# Altium PCB Voltage & Current Sensor V2.PcbDoc
Units mil, origin at the board's own origin, x right, y up, seen from the top; angles counter-clockwise.
Board outline 2295.15 x 865 mil, 4 copper layers (Signal 1 Layer, GND Layer, V+ Layer, Signal 2 Layer), stack 62.449 mil thick; 18 components, 10 nets, 51 pads, 14 vias.
Unrouted connection lines stored in the file: 1.
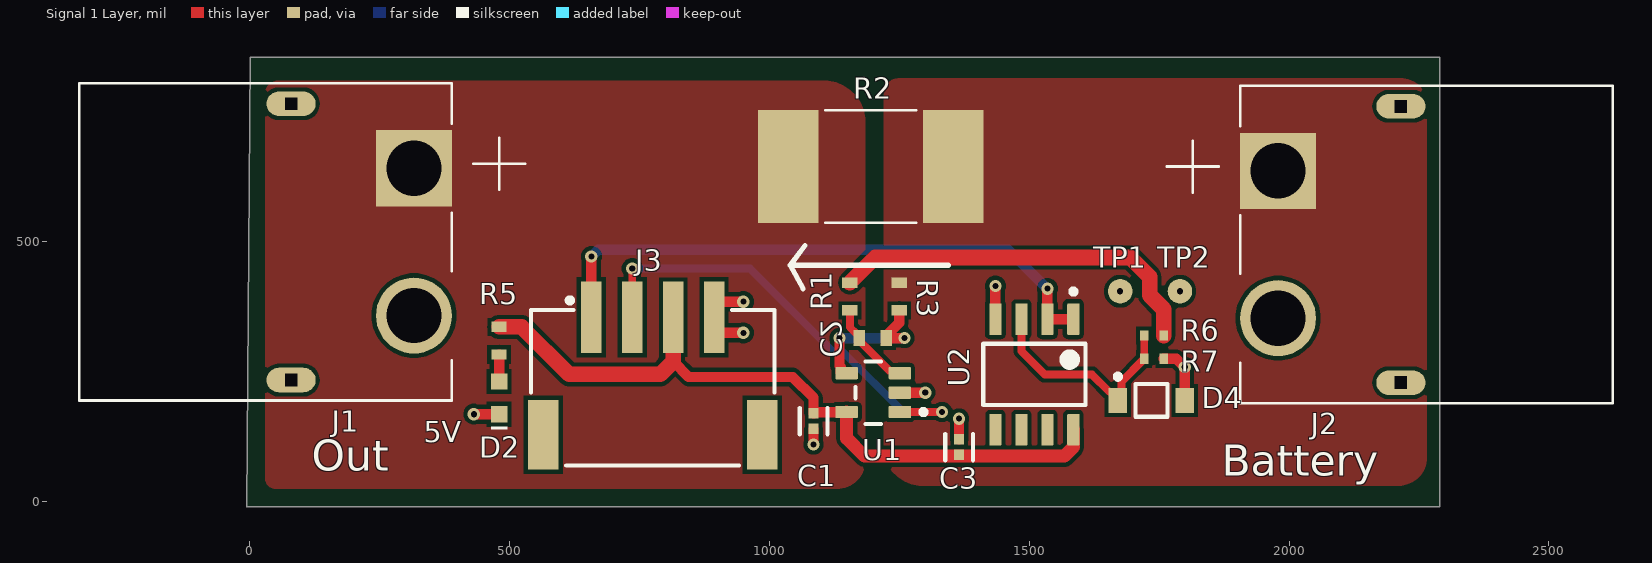
[diagram p0: Signal 1 Layer view]
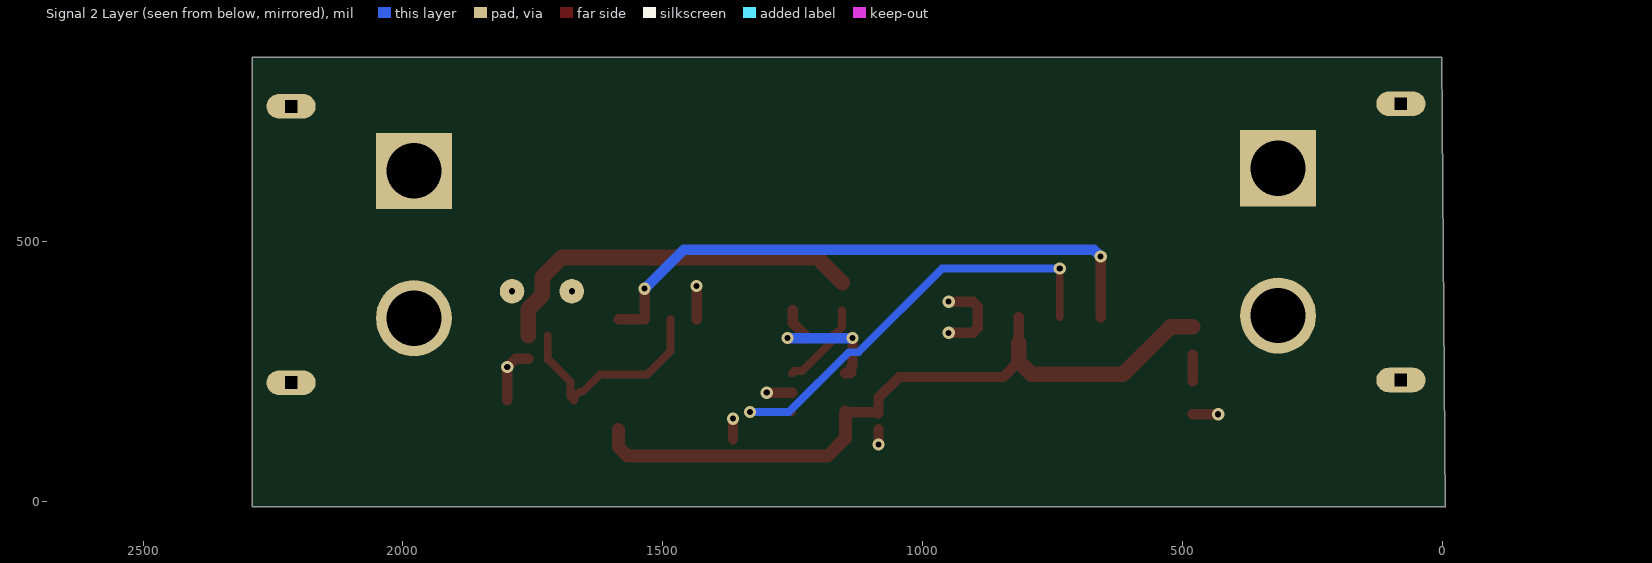
[diagram p1: Signal 2 Layer view, seen from below]
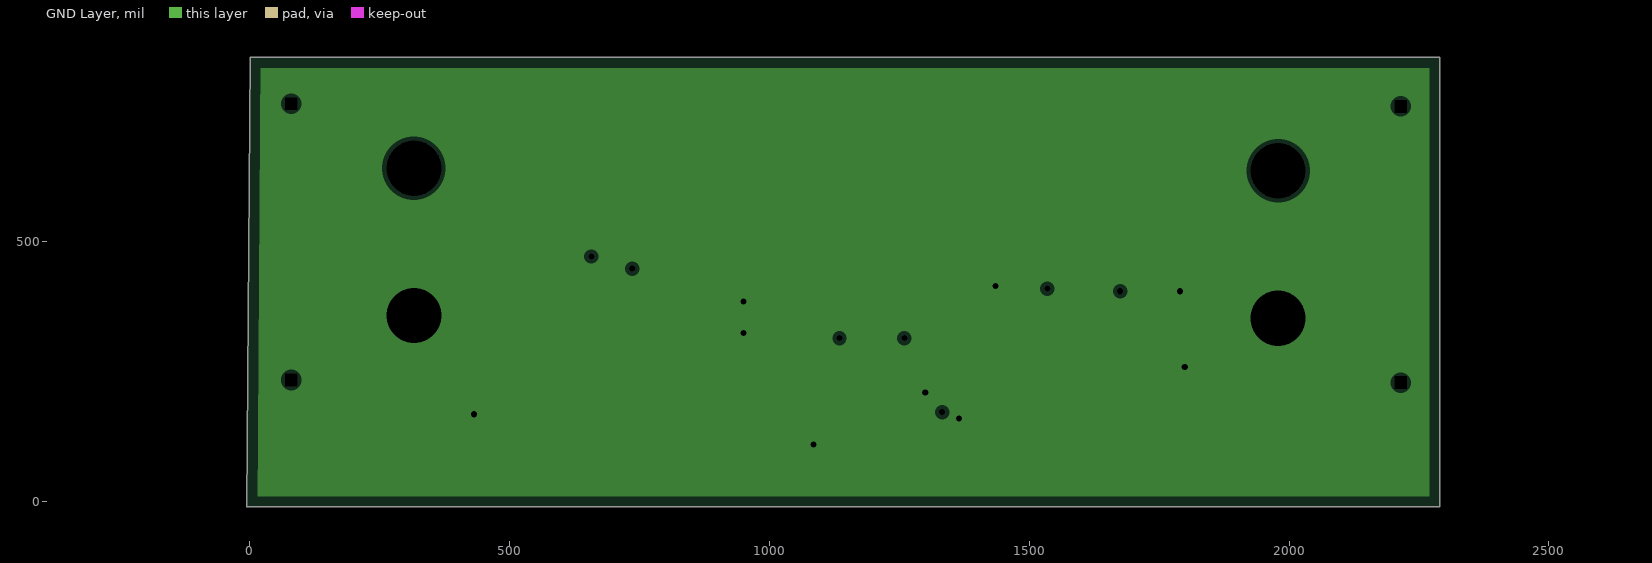
[diagram p2: GND Layer, clearances drawn from the general rule]
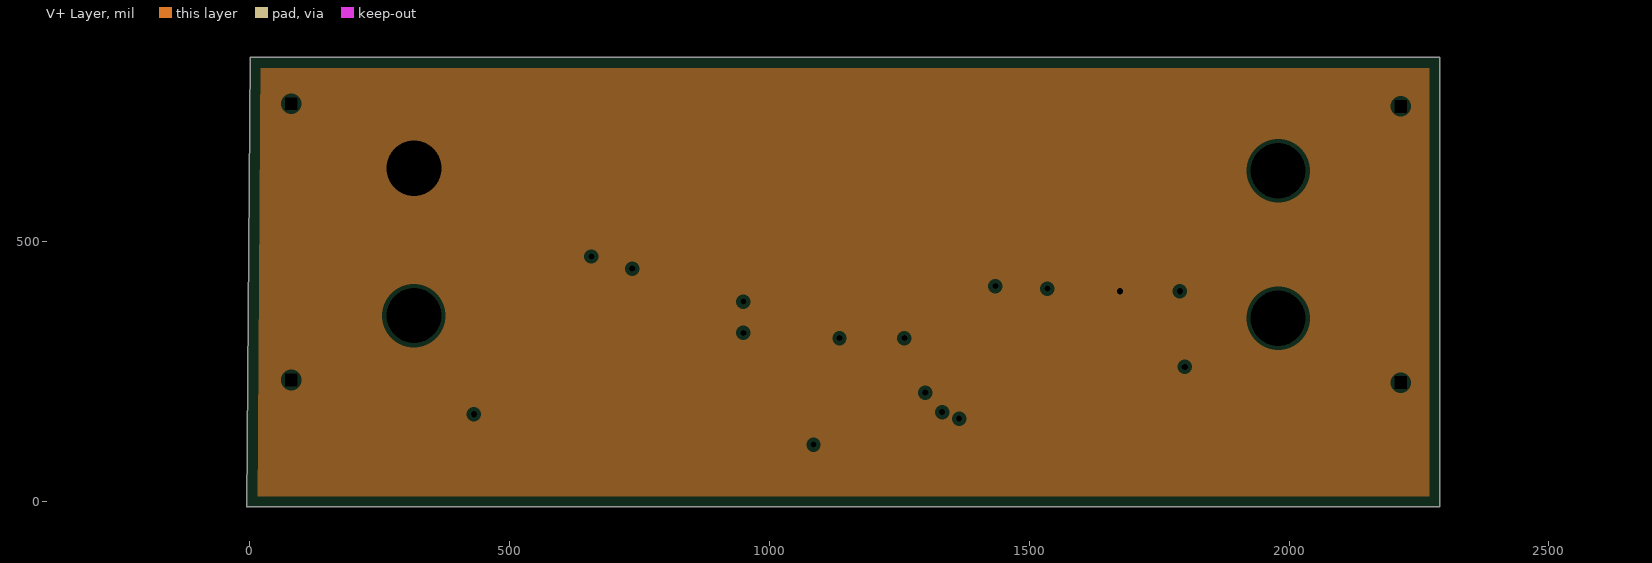
[diagram p3: V+ Layer, clearances drawn from the general rule]
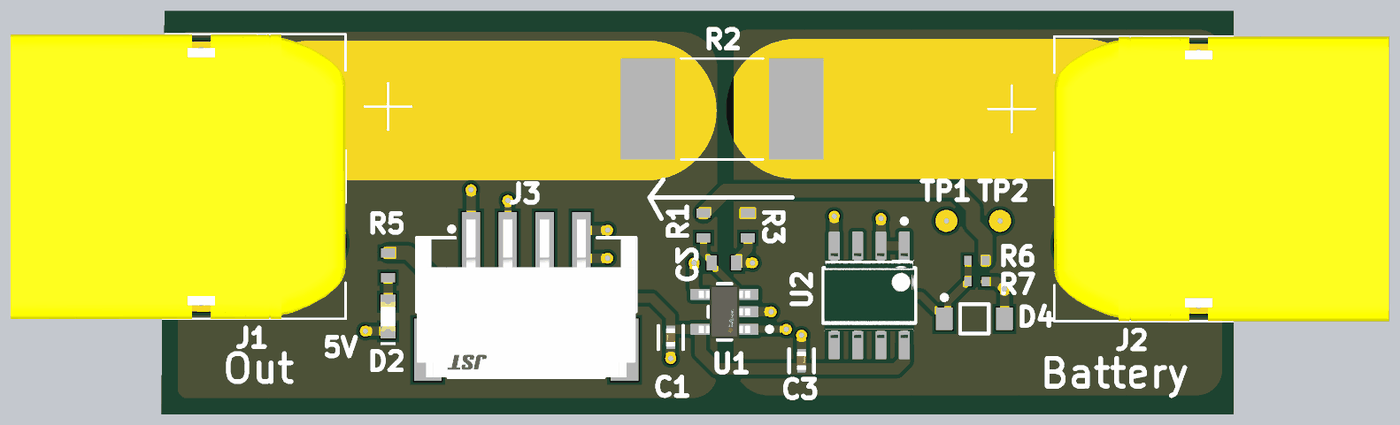
[diagram p4: 3D render of the assembled board from above, using the file's embedded part models]

## Layer stack, top to bottom
Top Solder: solder mask 0.4, Solder Resist, Dk 3.5
Signal 1 Layer: signal copper 1.378
Dielectric 2: prepreg 8.2835, PP-006, Dk 4.1
GND Layer: plane copper 0.5984, net GND
Dielectric 1: dielectric 41.9291, FR-4, Dk 4.8
V+ Layer: plane copper 0.5984, net V+
Dielectric 3: prepreg 8.2835, PP-006, Dk 4.1
Signal 2 Layer: signal copper 1.378
Bottom Solder: solder mask 0.4, Solder Resist, Dk 3.5

## Board outline
1.4,855 -5.15,-9.85 ccw(c-5,-9.85) -5,-9.71 2290,-9.71 2290,855

## Design rules (kind name [scope] priority, off if disabled: settings)
BoardOutlineClearance [All] p1: gap=7.87 ignorepadtopadclearanceinfootprint=FALSE
Clearance [All] p1: gap=8 ignorepadtopadclearanceinfootprint=FALSE except(9.84: Arc-Hole Track-Hole SMDPad-Hole THPad-Hole Via-Hole Fill-Hole Poly-Hole Region-Hole Text-Hole)
ComponentClearance [All] p1: gap=5 collisioncheckmode=3 verticalgap=5 showdistances=TRUE
DiffPairsRouting [All] p1: maxlimit=15 minlimit=8 mostfreqgap=8 toplayer_minwidth=8 toplayer_maxwidth=1000 toplayer_prefwidth=8 bottomlayer_minwidth=8 bottomlayer_maxwidth=1000 bottomlayer_prefwidth=8 maxuncoupledlength=500
Height [All] p1: minheight=0 maxheight=71497.94 prefheight=500
HoleSize [All] p1: absolutevalues=TRUE maxlimit=248.03 minlimit=11.81 maxpercent=80.000 minpercent=20.000
HoleToHoleClearance [All] p1: gap=9.84 allowstackedmicrovias=FALSE
MinimumAnnularRing [All] p1: minimumring=3
MinimumSolderMaskSliver [All] p1: minsoldermaskwidth=0
PlaneClearance [All] p1: clearance=8
PlaneConnect PlaneConnectPowerPads [InPadClass('PowerPads')] p1: planeconnectstyle=Direct reliefexpansion=20 reliefentries=4 reliefconductorwidth=10 reliefairgap=10
PlaneConnect [All] p2: pad.planeconnectstyle=Relief pad.reliefexpansion=11.81 pad.reliefentries=4 pad.reliefconductorwidth=8 pad.reliefairgap=8 via.planeconnectstyle=Direct via.reliefexpansion=11.81 via.reliefentries=4 via.reliefconductorwidth=5 via.reliefairgap=5
PolygonConnect PolygonConnectPowerPads [All vs (InPadClass('PowerPads'))] p1: connectstyle=Direct reliefconductorwidth=10 reliefentries=4 polygonreliefangle="90 Angle" airgapwidth=10
PolygonConnect [All] p2: connectstyle=Direct reliefconductorwidth=8 reliefentries=4 polygonreliefangle="90 Angle" airgapwidth=8
RoutingVias [All] p1: holewidth=11.81 width=23.62 viastyle="Through Hole" minholewidth=11.81 minwidth=23.62 maxholewidth=23.62 maxwidth=259.84
SilkToSilkClearance [All] p1: silktosilkclearance=0
SilkToSolderMaskClearance [IsPad] p1: minsilkscreentomaskgap=5 clearancetoexposedcopper=TRUE
SolderMaskExpansion [All] p1: expansion=2.95 istentingtop=FALSE
Width [All] p1: maxlimit=1000 minlimit=8 preferedwidth=8 minimp=50.000000 maximp=50.000000 favimp=50.000000
20 further rules are at their usual default settings.

## Components (designator, comment, footprint, x,y, rotation, side; value= is the part's Value field where it differs from the comment)
C1 "0.1 uF" FP-CL17-IPC_C 1085,155 r270 top
C2 "1uF" "IPC C C0603 NO SILK" 1199.02,315 r180 top value=?F
C3 "0.1 uF" FP-CL17-IPC_C 1365,105 r90 top
D2 "150060GS75000" WL-SMCW_0603_150060xx75000 480,200 r90 top
D4 "3.6V" ONSC-SOD-123-2-425-04_V 1735,195 r0 top
J1 "XT60PW-M" AMASS_XT60PW-M#1 80,500 r90 top
J2 "XT60PW-M" AMASS_XT60PW-M#2 2215,495 r90 top
J3 "S4B-PH-SM4-TB" FP-S4B-PH-SM4-TB-MFG 775.63,219.17 r180 top
R1 "10" "IPC C R0603 NO SILK" 1155,395 r270 top value=?
R2 "1m" RESC10052X105N 1195,645 r180 top
R3 "10" "IPC C R0603 NO SILK" 1250,395 r270 top value=?
R5 "62" "IPC C R0603 NO SILK" 480,310 r90 top value=?
R6 "2k" "IPC C R0402 NO SILK" 1740,320 r0 top value=?
R7 "470" "IPC C R0402 NO SILK" 1740,275 r180 top value=?
TP1 "TP1" TP1 1675,405 r0 top
TP2 "TP1" TP1 1790,405 r0 top
U1 "INA180A2IDBVR" FP-DBV0005A-MFG 1200,210 r180 top
U2 "LM358LVIDR" FP-D0008A-MFG 1510,245 r270 top

## Footprints (in the part's own frame and the unit in brackets; to place one, negate y for a bottom-side part, rotate by r counter-clockwise, add the part's x,y. Pads: shape width x height; smd on the part's side, far side on the other; paste and mask are expansions set on the pad)
AMASS_XT60PW-M#1 [mm]
  rect 3.716x3.716 / inner round 3.716 / far side rect 3.716x3.716 hole 2.7: 1(3.6,-6)
  round 3.716 hole 2.7: 2(-3.6,-6)
  oval 1.2x2.4 hole 0.6 square: S1(6.75,0) S2(-6.75,0)
  silkscreen extent -7.75,-11.43 7.75,10.35, body extent -7.75,-7.85 7.75,10.35, height 8.4
AMASS_XT60PW-M#2 [mm]
  rect 3.716x3.716 / inner round 3.716 / far side rect 3.716x3.716 hole 2.7: 1(3.6,6)
  round 3.716 hole 2.7: 2(-3.6,6)
  oval 1.2x2.4 hole 0.6 square: S1(6.75,0) S2(-6.75,0)
  silkscreen extent -7.75,-10.35 7.75,11.43, body extent -7.75,-10.35 7.75,7.85, height 8.4
FP-CL17-IPC_C [mil]
  rect 20.29x18.6 smd paste+0 mask+0: 1(-14.9,0) 2(14.9,0)
  silkscreen extent -25,-27 25,27, body extent -20,-10 20,10, height 22
FP-D0008A-MFG [mm]
  rrect17% 1.55x0.6 smd paste+0 mask+0: 1(-2.7,1.905) 2(-2.7,0.635) 3(-2.7,-0.635) 4(-2.7,-1.905) 5(2.7,-1.905) 6(2.7,-0.635) 7(2.7,0.635) 8(2.7,1.905)
  silkscreen extent -4.17,-2.5 1.5,2.5, body extent -3.57,-2.75 3.57,2.75, height 0.25
FP-DBV0005A-MFG [mm]
  rrect17% 1.1x0.6 smd paste+0 mask+0: 1(-1.3,0.95) 2(-1.3,0) 3(-1.3,-0.95) 4(1.3,-0.95) 5(1.3,0.95)
  silkscreen extent -2.58,-1.53 0.87,1.53, body extent -1.4,-1.45 1.4,1.45, height 1.45
FP-S4B-PH-SM4-TB-MFG [mm]
  rect 1x3.5 smd: 1(3,-3.45) 2(1,-3.45) 3(-1,-3.45) 4(-3,-3.45)
  rect 1.5x3.4 smd: 5(-5.35,2.3) 6(5.35,2.3)
  silkscreen extent -5.95,-4.4 5.95,3.8, body extent -6.2,-5.3 6.2,4.1, height 0.25
"IPC C C0603 NO SILK" [mm] "Chip Capacitor, 2-Leads, Body 1.52x0.76mm, IPC High Density"
  rect 0.56x0.8 smd: 1(-0.66,0) 2(0.66,0)
  body extent -0.76,-0.38 0.76,0.38, height 0.77
"IPC C R0402 NO SILK" [mm] "Chip Resistor, 2-Leads, Body 1.02x0.51mm, IPC High Density"
  rect 0.4x0.5 smd: 1(-0.475,0) 2(0.475,0)
  body extent -0.51,-0.26 0.51,0.26, height 0.26
"IPC C R0603 NO SILK" [mm] "Chip Resistor, 2-Leads, Body 1.52x0.76mm, IPC High Density"
  rect 0.5x0.75 smd: 1(-0.675,0) 2(0.675,0)
  body extent -0.76,-0.38 0.76,0.38, height 0.39
ONSC-SOD-123-2-425-04_V [mm] "SOD, 2-Leads, Body 2.69x1.6mm"
  rect 0.91x1.22 smd: 1(-1.635,0) 2(1.635,0)
  silkscreen extent -1.76,-0.8 0.78,1.28, body extent -1.35,-0.8 1.35,0.8, height 1.35
RESC10052X105N [mm]
  rect 2.96x5.51 smd: 1(-4.027,0) 2(4.027,0)
  silkscreen extent -2.23,-2.75 2.23,2.75
TP1 [mm]
  round 1.2 hole 0.3: 1(0,0)
WL-SMCW_0603_150060xx75000 [mm] "SMD Mono-color Chip LED, body 1.60 x 0.80 mm"
  rect 0.8x0.8 smd: 1(-0.8,0) 2(0.8,0)
  silkscreen extent -1.55,-0.4 -1.4,0.4, body extent -0.8,-0.4 0.8,0.4, height 0.7

## Part data
C1 C3: library part CMP-13271-001069-1, "Cap Ceramic 100nF 10V X7R ±10% SMD 0402 +125°C Paper T/RCL05B104KP5NNNC", Capacitance=100nF, Case Code (Imperial)=0402, Case Code (Metric)=1005, Dielectric=X7R, Max Operating Temperature=125°C, Min Operating Temperature=-55°C, Package Quantity=1, Tolerance=10%, Voltage Rating=10V, Case/Package=0402, Contact Plating=Tin, Depth=0.5mm, Height=0.5mm, Length=1mm, Mount="Surface Mount", Packaging="Tape and Reel", Radiation Hardening=No, Thickness=0.022inch, Width=0.02inch
C2: library part CMP-002-000001-1, "Generic CAP 0603", Design Item ID="Generic CAP 0603", Source=Schlib1.SchLib
D2: library part CMP-1426-00002-4, "430mcd Colorless transparence 520nm Emerald 140° LED0603 Light Emitting Diodes (LED) ROHS", Case Code (Imperial)=0603, Case Code (Metric)=1608, Color=Green, Forward Current=100mA, Forward Voltage=3.2V, Max Junction Temperature (Tj)=95°C, Max Operating Temperature=85°C, Max Reverse Voltage (DC)=5V, Min Operating Temperature=-40°C, Output Current=10µA, Power Dissipation=105mW, Test Current=20mA, Case/Package=0603, Dominant Wavelength=525nm, Height=700µm, Lead Free="Lead Free", Length=1.6mm, Lens Style="Clear, Rectangular", Luminous Intensity=430mcd, Mount="Surface Mount", Packaging="Tape and Reel", Peak Wavelength=515nm, REACH SVHC=Unknown, Reverse Voltage=5V, RoHS=Compliant, Viewing Angle=140°, Wavelength=525nm, Width=800µm
D4: library part CMP-1060-00574-1, "Zener Voltage Regulator, 500 mW, 2-Pin SOD-123, Pb-Free, Tape and Reel. 3.6V breakdown voltage MMSZ4685T1G", Manufacturer="On Semiconductor", PartNumber=MMSZ4685T1G, ComponentLink1Description="Manufacturer URL", ComponentLink1URL=http://www.onsemi.com/, ComponentLink2Description=Datasheet, ComponentLink2URL=http://www.onsemi.com/pub_link/Collateral/MMSZ4678T1-D.PDF, ComponentLink3Description="Package Specification", ComponentLink3URL=http://www.onsemi.com/pub_link/Collateral/425-04.PDF, DatasheetVersion="Rev. 9", Mounting Technology="Surface Mount", P Max (W)=0.5, PackageDescription="2-Pin SOD, Body 1.6 x 2.69 mm", PackageReference=SOD-123-2-425-04, PackageVersion="Rev. G, 10/2009", Packing="Tape and Reel", RoHS=Pb-Free, VZ Typ (V)=3.6
J1 J2: library part CMP-003-000005-1, "Socket, DC supply, male, PIN: 2", Package=Package, Availability="Not in stock", Check_prices=https://www.snapeda.com/parts/XT60PW-M/AMASS/view-part/?ref=eda, Component Type=Standard, Design Item ID=XT60PW-M, MF=AMASS, MP=XT60PW-M, Pin Count=2, Price=None, SnapEDA_Link=https://www.snapeda.com/parts/XT60PW-M/AMASS/view-part/?ref=snap, Source=XT60PW-M.SchLib
J3: library part CMP-00504-08293667-1, "S4B-PH-SM4-TB Header S4B-PH-SM4-TB, 2.00mm, 4-contacts, side entry, SMT, /1000/reel", Contact Resistance=20mΩ, Current Rating=2A, Housing Color=Beige, Max Operating Temperature=85°C, Max Voltage Rating (AC)=100V, Min Operating Temperature=-25°C, Contact Material="Copper, Tin", Contact Plating="Copper, Tin", Depth=7.6mm, Gender=Male, Height=5.5mm, Housing Material=Polyamide, Length=11.9mm, Max Current Rating=2A, Max Voltage Rating (DC)=100V, Number of Contacts=4, Number of Pins=4, Number of Rows=1, Packaging="Tape and Reel", Pitch=2mm, RoHS=Non-Compliant, Termination=Solder, Voltage Rating=100V
R1 R3 R5: library part CMP-008-000001-2, "Generic RES 0603", Design Item ID="Generic RES 0603", Source=Schlib1.SchLib
R2: library part PSR400ITQFH1L00, "Res Metal Film 3921 1mOhm 1% 4W Â±75ppm/Â°C Molded SMD Emboss T/R PSR400ITQFH1L00", Package=None, Availability=Unavailable, MP=PSR400ITQFH1L00, Price=None
R6 R7: library part CMP-008-000000-1, "Generic RES 0402", Design Item ID="Generic RES 0402", Source=Schlib1.SchLib
TP1 TP2: library part CMP-00003-3, "Testpoint double sided"
U1: library part CMP-04895-000287-1, "IC CURR SENSE 1 CIRCUIT SOT23-5 50V/V", Case/Package=SOT-23-5, Input Bias Current=100nA, Input Offset Voltage (Vos)=100uV, Max Operating Temperature=125°C, Min Operating Temperature=-40°C, Operating Supply Current=260uA, -3db Bandwidth=350kHz, Mount="Surface Mount", Number of Circuits=1, Packaging="Tape and Reel", RoHS Compliant=Yes, Slew Rate=2V/µs
U2: library part CMP-04895-000442-1, "IC OPAMP GP 2 CIRCUIT 8SOIC", Case/Package=SOIC, Input Bias Current=15pA, Input Offset Voltage (Vos)=1mV, Max Operating Temperature=125°C, Min Operating Temperature=-40°C, Operating Supply Current=90uA, Output Current per Channel=40mA, Gain Bandwidth Product=1MHz, Mount="Surface Mount", Number of Circuits=2, Number of Pins=8, Packaging="Cut Tape", RoHS Compliant=Yes, Slew Rate=1.5V/µs

## Via types
v1: diameter 23.62, hole 11.81, Signal 1 Layer to Signal 2 Layer, 14 vias

## Nets (pads, with @x,y where several pads share a name; then routed paths per layer and width w, separated by ;. In a path a pad name is that pad's centre, name@x,y a point inside that pad or via, vN(x,y) a via of type N, cw(c..) or ccw(c..) an arc to the next point about the centre after c; other vN are vias at no path point)
5V: C1.1 C3.1 J3.3 R5.2 U1.5 U2.8 | length 1404.2
  Signal 1 Layer w20: 815,270 845,240 1045,240 1085,200 C1.1 1085.55,169.9 1088.25,172.6 U1.5 ; J3.3@815,305.79 J3.3
  Signal 1 Layer w25: U1.5 1148.82,121.91 1183.04,87.69 1567.69,87.69 1585,105 U2.8
  Signal 1 Layer w30: R5.2 523.43,336.57 615,245 790,245 815,270 J3.3@815,305.79
GND: C1.2 C3.2 D2.1 D4.2 J1.2 J2.2 J3.4 R7.1 TP2.1 U1.2 U2.4 | length 506.3
  Signal 1 Layer w20: v1@430,170 ccw(c431.5,170) v1(431.5,168.5) D2.1 ; v1(950,325) 903.43,325 893.74,334.69 893.74,375.31 903.43,385 v1(950,385) ; v1(1085,110) C1.2 ; U1.2 v1(1300,210) ; C3.2 v1(1365,160) ; U2.4 v1(1435,415) ; R7.1 1782.76,275 1798.39,259.37 v1(1799.37,259.37) D4.2
Iout: J3.2 U1.1 | length 885.5
  Signal 1 Layer w15: J3.2 v1(736.26,448.74) ; U1.1 v1(1332.4,172.6)
  Signal 2 Layer w15: v1(736.26,448.74) 962.64,448.74 1123.69,287.69 1142.31,287.69 1257.4,172.6 v1(1332.4,172.6)
NetC2_1: C2.1 R3.2 U1.4 | length 302.9
  Signal 1 Layer w20: v1(1135,315) 1135,261.22 1137.17,259.06 1137.17,249.21 1138.98,247.4 U1.4 ; R3.2 1250,344.72 1225,319.72 C2.1 v1(1260,315)
  Signal 2 Layer w20: v1(1135,315) v1(1260,315)
NetC2_2: C2.2 R1.2 U1.3 | length 170.8
  Signal 1 Layer w15: R1.2 1155,336.08 1167.83,323.25 1169.51,323.25 1173.03,319.72 C2.2 1173.03,310.28 1231.59,251.71 1246.87,251.71 U1.3
NetD2_2: D2.2 R5.1 | length 51.9
  Signal 1 Layer w20: D2.2 R5.1
NetD4_1: D4.1 R6.1 R7.2 U2.3 | length 436.5
  Signal 1 Layer w15: U2.3 1485,290 1530,245 1620.63,245 1654.11,211.52 1660.22,211.52 1670.63,201.1 D4.1 1677.84,202.21 1677.84,231.54 1718.96,272.66 1720.93,272.66 R7.2@1720.93,274.63 ; R7.2 R6.1
V+: J1.1 R1.1 R2.2 R6.2 TP1.1 | length 736
  Signal 1 Layer w30: R1.1 1203.43,470 1694.28,470 1731.85,432.43 1731.85,397.22 1758.7,370.37 R6.2
Vload: J2.1 R2.1 R3.1
Vout: J3.1 U2.1 U2.2 | length 1139.6
  Signal 1 Layer w20: J3.1 v1(657.52,471.92) ; v1(1535,410) U2.2 U2.1
  Signal 2 Layer w20: v1(657.52,471.92) 657.97,471.92 671.05,485 1460,485 v1(1535,410)
pads on no net: J1.S1 J1.S2 J2.S1 J2.S2 J3.5 J3.6 U2.5 U2.6 U2.7

## Polygon pours and split planes (outlines as drawn)
Vload on Signal 1 Layer "NONET_L-01_P-001" (solid, pour order 7): 1220,105.58 ccw(c1294.36,105.58) 1294.36,31.23 2211.23,31.23 ccw(c2211.23,85) 2265,85 2265,765 ccw(c2215,765) 2215,815 1250,815 ccw(c1250,785) 1220,785
V+ on Signal 1 Layer "NONET_L-01_P-001" (solid, pour order 6): 30,45 ccw(c50,45) 50,25 1130,25 ccw(c1130,80) 1185,80 1185,730 ccw(c1105,730) 1105,810 55,810 ccw(c55,785) 30,785
GND on GND Layer (split plane): 2269.9,10.39 15.1,10.39 21.35,834.9 2269.9,834.9
V+ on V+ Layer (split plane): 2269.9,10.39 15.1,10.39 21.35,834.9 2269.9,834.9

## Silkscreen, mask and mechanical layers (free items; w line width, h text height)
Top Overlay:
  lines w10: 1065,410 1040,455 ; 1068.74,493.2 1040,455 ; 1345,455 1040,455
  text "5V" at 335,115 h40
  text "Out" at 120,60 h60
  text "Battery" at 1870,49.99 h60
Top Solder:
  lines w300: 316.22,641.73 1033.19,641.73 ; 1353.54,645 1970.51,645